# Altium PCB 3_inch_V1.PcbDoc (part 1 of 2)
Units mm, origin at the board's own origin, x right, y up, seen from the top; angles counter-clockwise.
Board outline 36.7 x 32 mm, 4 copper layers (Top Copper, Signal Layer 1, Signal Layer 2, Bottom Copper), stack 1.17 mm thick; 15 components, 44 nets, 117 pads, 124 vias.
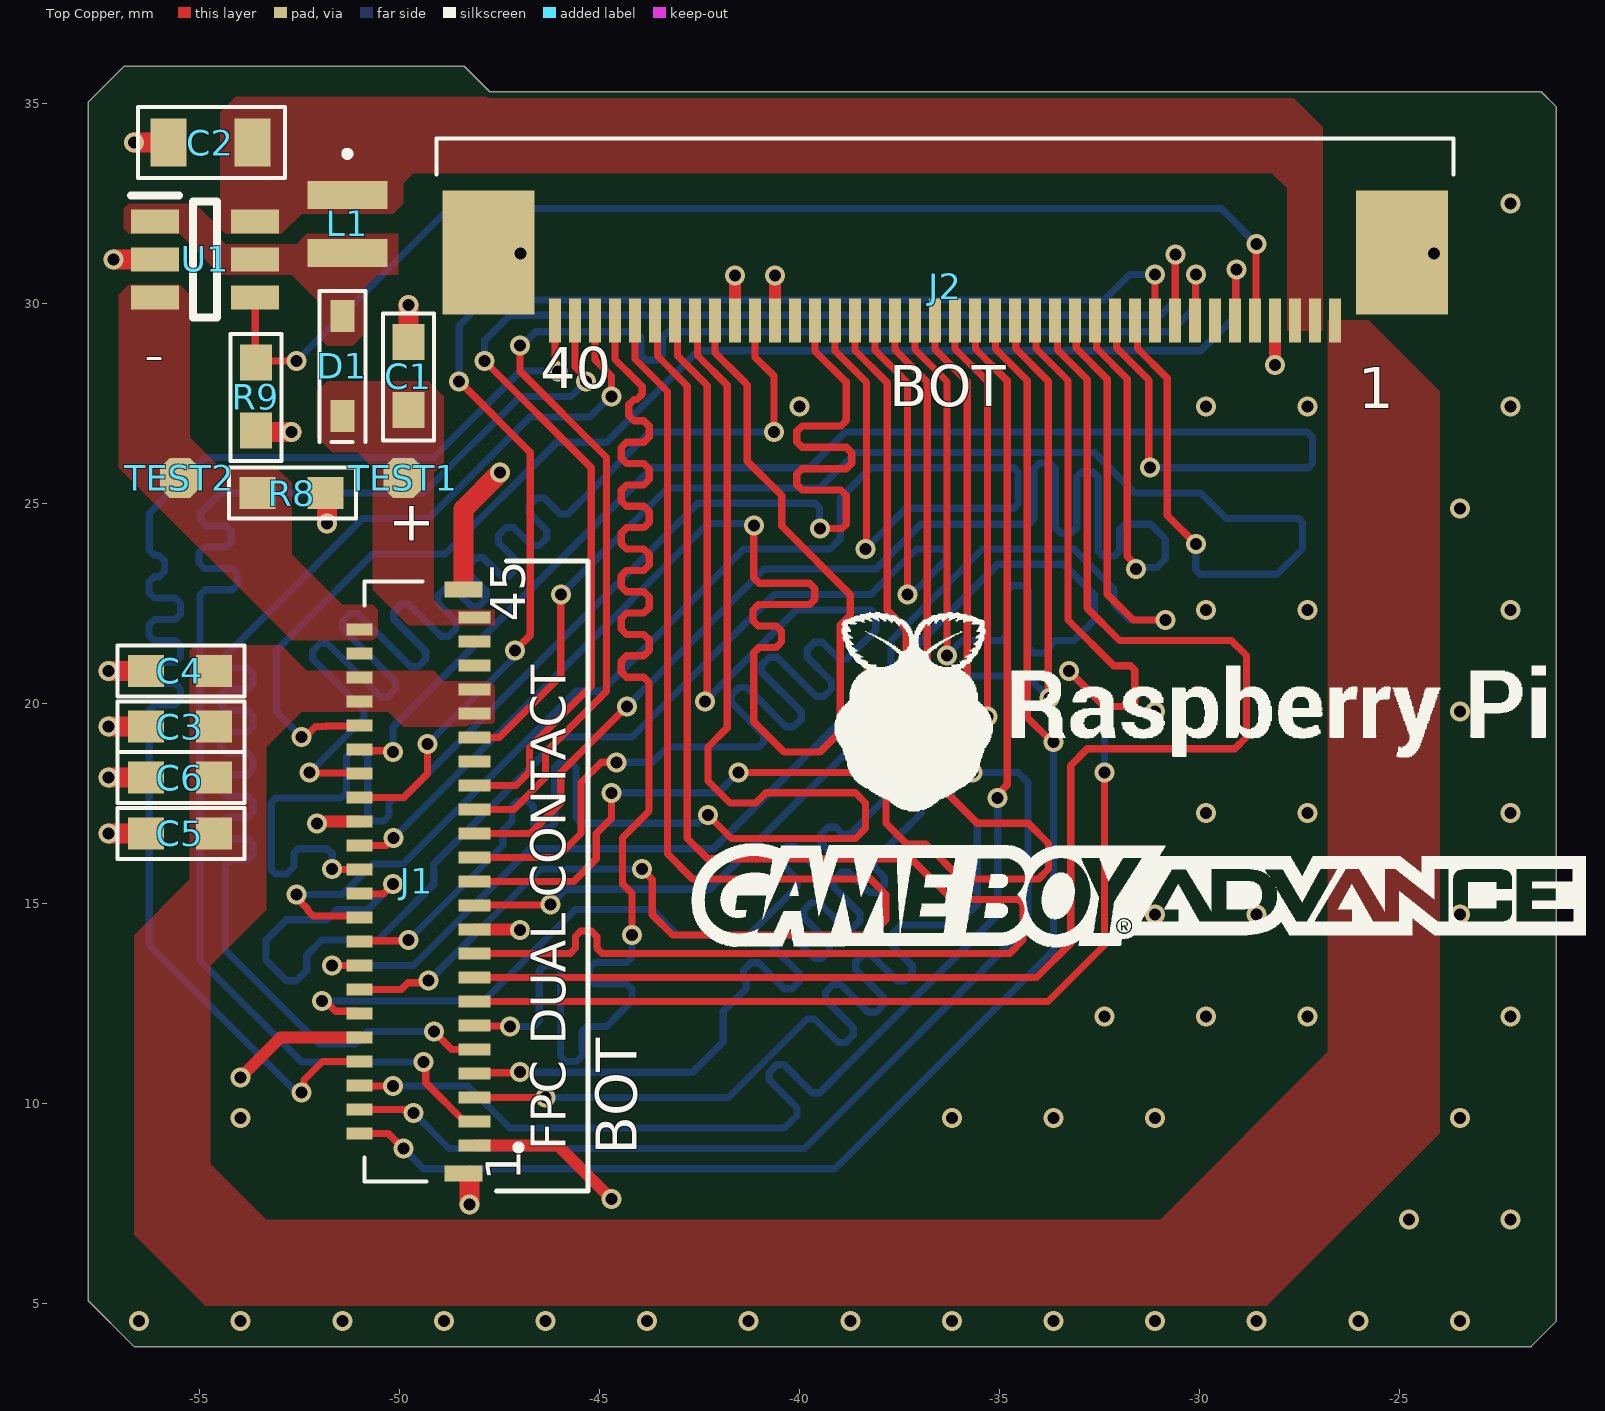
[diagram p0: Top Copper view]
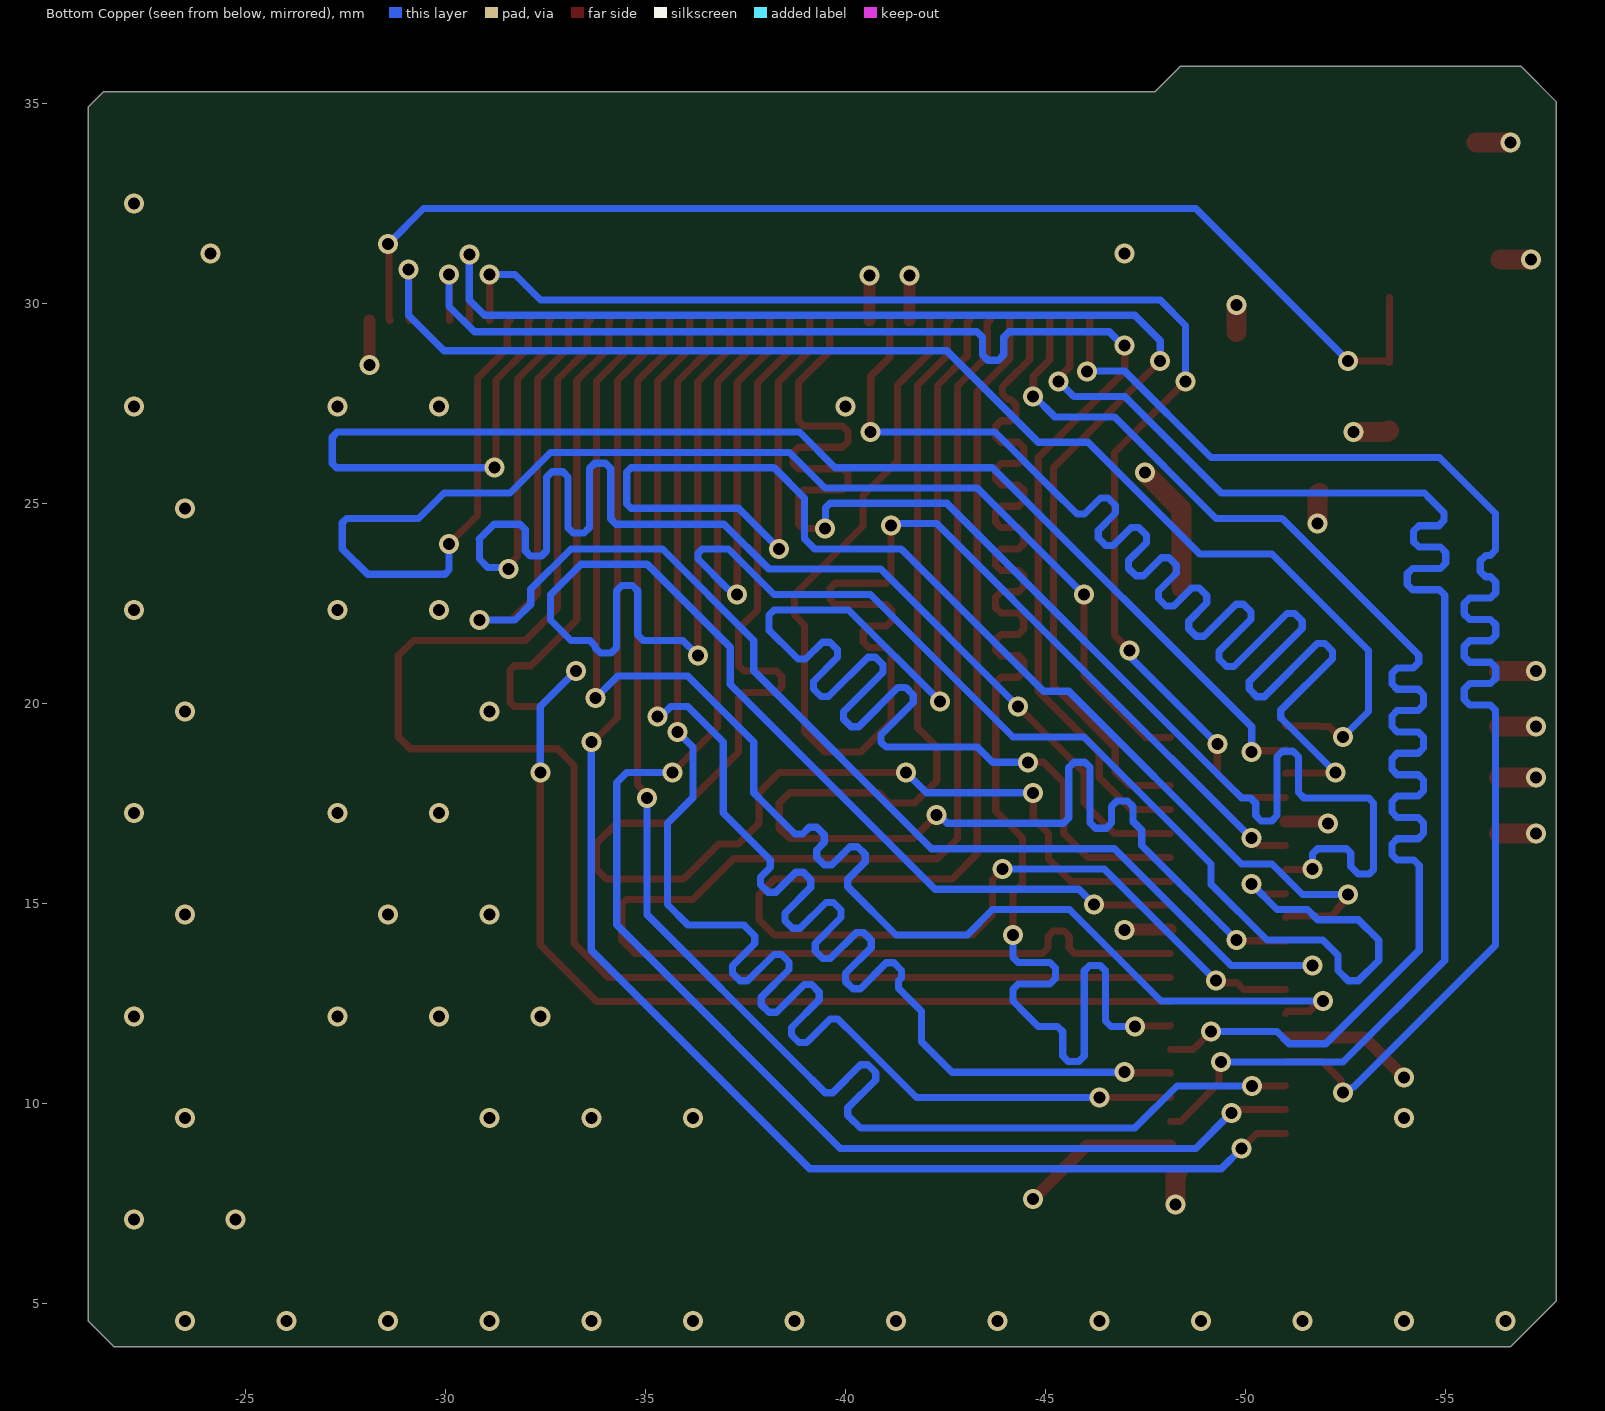
[diagram p1: Bottom Copper view, seen from below]
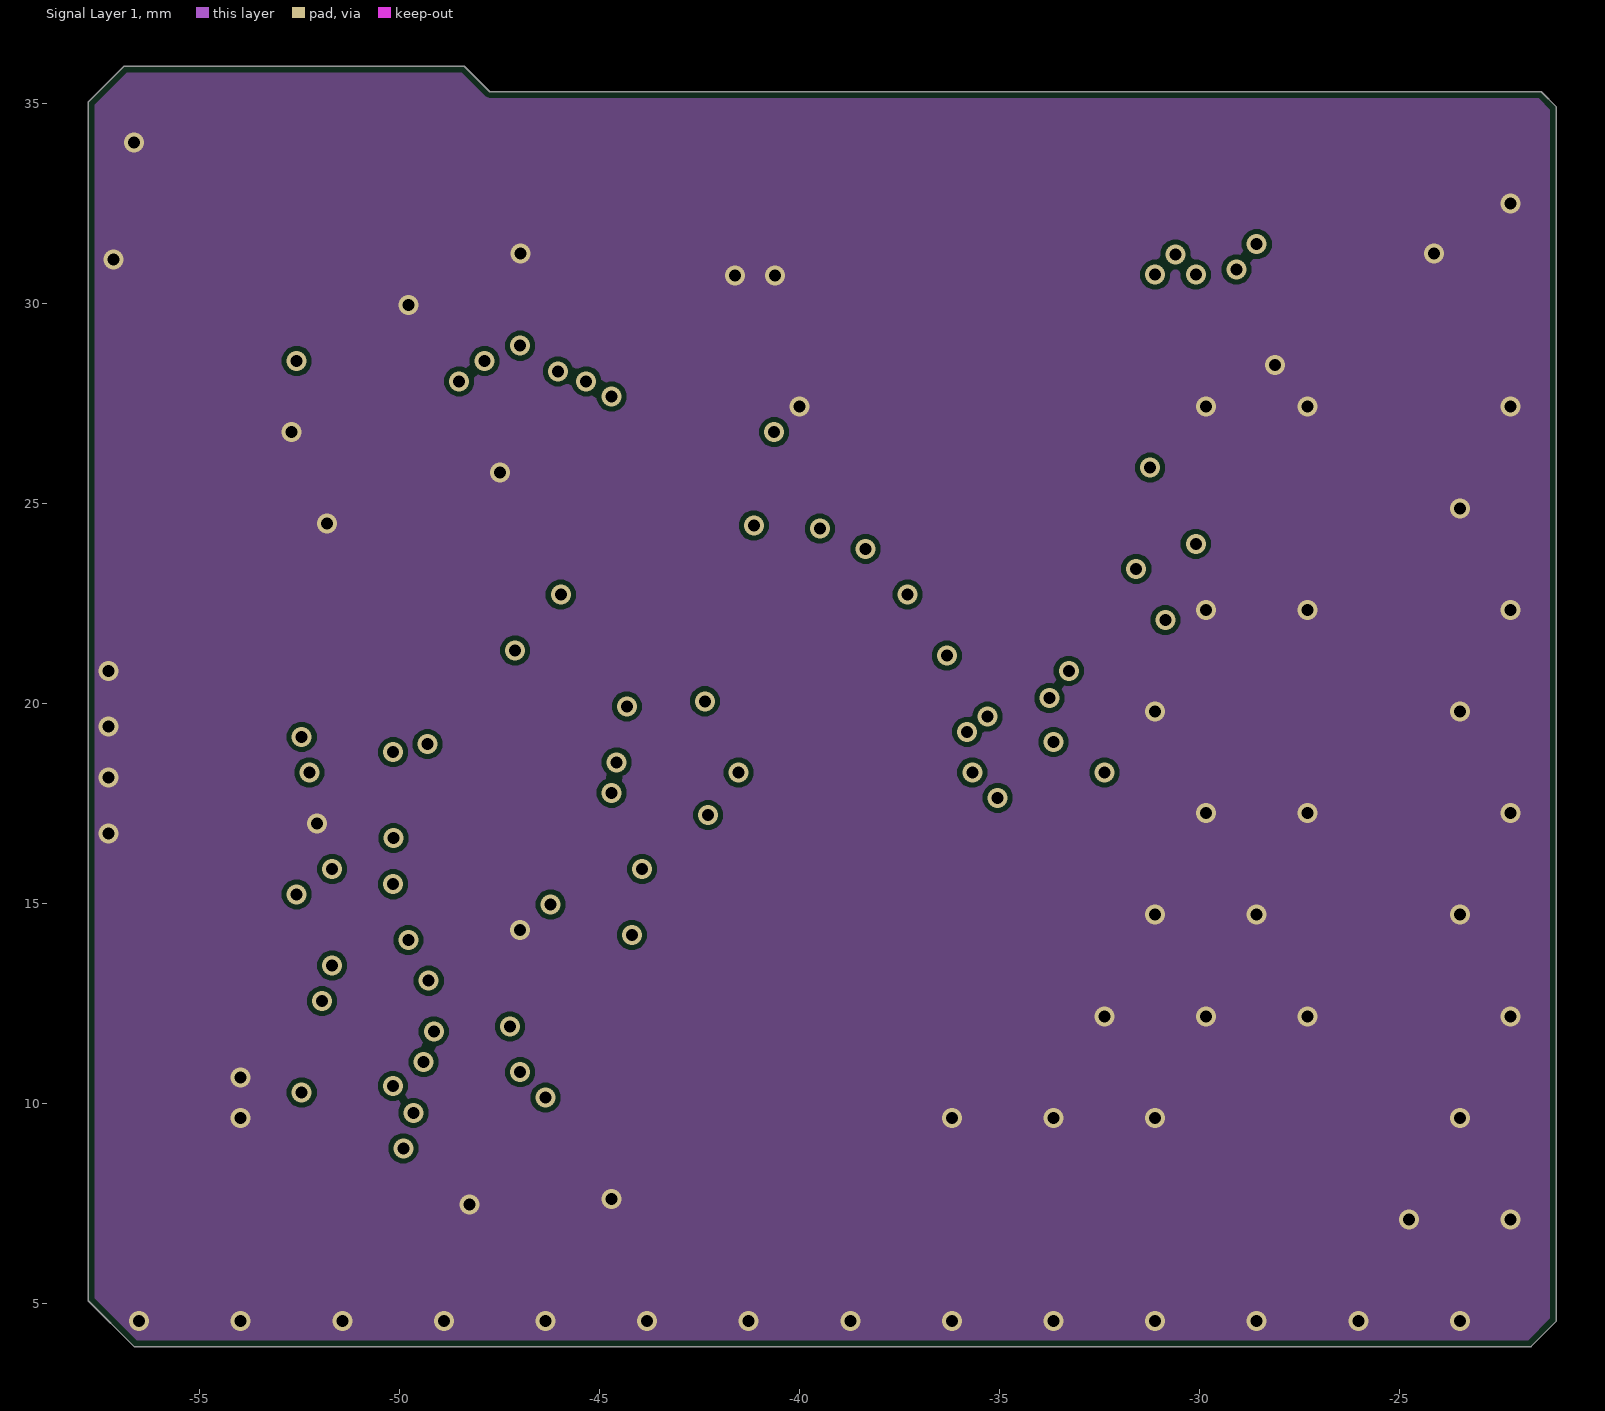
[diagram p2: Signal Layer 1]
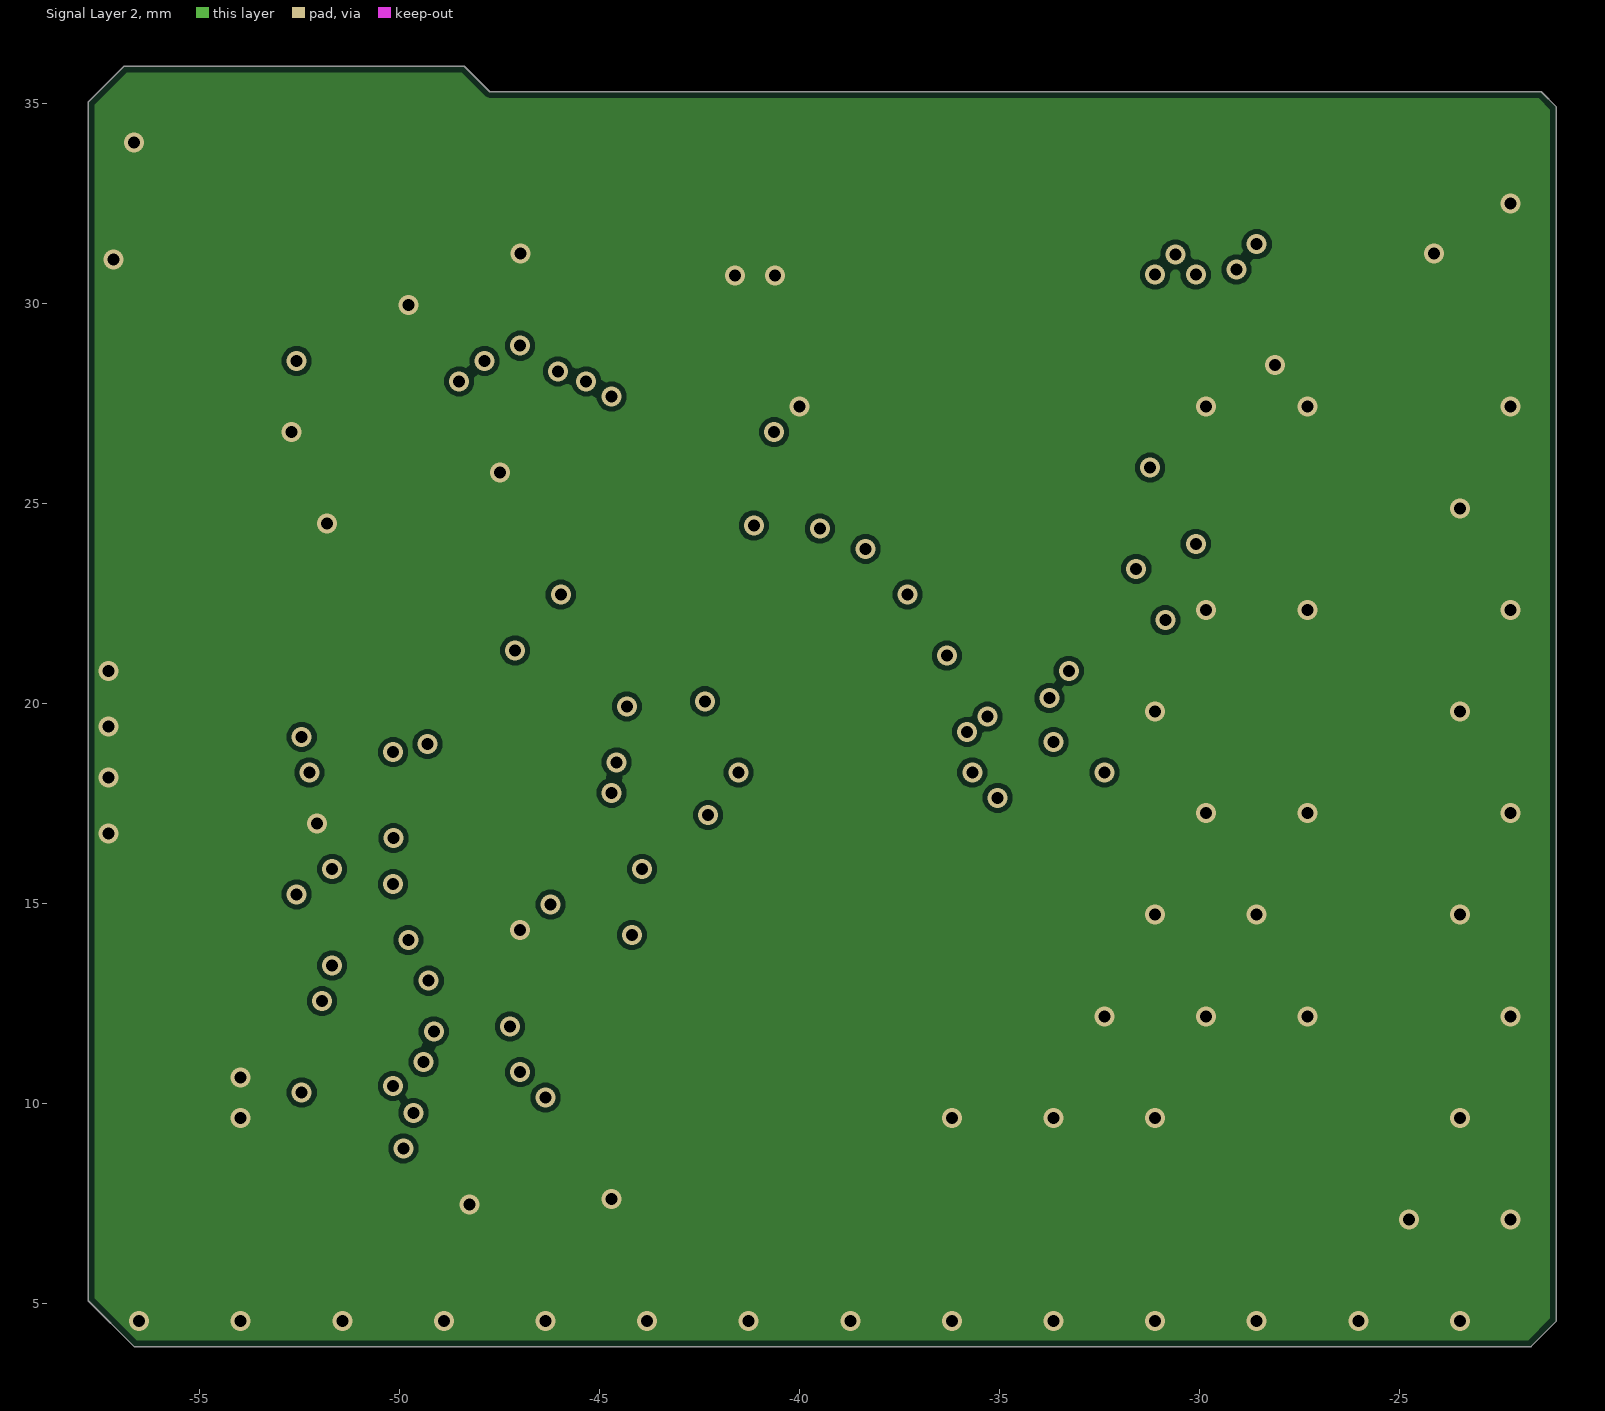
[diagram p3: Signal Layer 2]

## Layer stack, top to bottom
Top Mask: solder mask 0.015, Solder Resist, Dk 3.8
Top Copper: signal copper 0.035
Dielectric 1: prepreg 0.1, 2313, Dk 4.05
Signal Layer 1: signal copper 0.0175
Core: core 0.865, FR-4, Dk 4.5
Signal Layer 2: signal copper 0.0175
Dielectric 2: prepreg 0.1, 2313, Dk 4.05
Bottom Copper: signal copper 0.035
Bottom Mask: solder mask 0.015, Solder Resist, Dk 3.8

## Board outline
-57.785,5.08 -57.785,35.052 -56.896,35.941 -48.387,35.941 -47.752,35.306 -21.463,35.306 -21.082,34.925 -21.082,4.572 -21.717,3.937 -56.642,3.937

## Design rules (kind name [scope] priority, off if disabled: settings)
BoardOutlineClearance [All] p1: gap=0.15 ignorepadtopadclearanceinfootprint=FALSE except(0.4: Arc-SplitBarrior Arc-SplitContinuation Track-SplitBarrior Track-SplitContinuation SMDPad-SplitBarrior SMDPad-SplitContinuation THPad-SplitBarrior THPad-SplitContinuation Via-SplitBarrior Via-SplitContinuation Fill-SplitBarrior Fill-SplitContinuation Poly-SplitBarrior Poly-SplitContinuation Region-SplitBarrior Region-SplitContinuation Text-SplitBarrior Text-SplitContinuation)
Clearance USB [InAnyDifferentialPair] p1: gap=0.25 ignorepadtopadclearanceinfootprint=FALSE except(0.09: Arc-Arc Arc-Track Arc-SMDPad Arc-THPad Arc-Via Track-Track Track-SMDPad Track-THPad Track-Via SMDPad-SMDPad SMDPad-THPad SMDPad-Via THPad-THPad THPad-Via Via-Via; 0.127: Arc-Hole Track-Hole SMDPad-Hole THPad-Hole Via-Hole Fill-Hole Poly-Hole Region-Hole Text-Hole; 0.254: Arc-Text Track-Text SMDPad-Text THPad-Text Via-Text Fill-Text Poly-Text Region-Text Text-Text)
Clearance RGB24 [InNetClass('RGB24Bit')] p2: gap=0.09 ignorepadtopadclearanceinfootprint=FALSE except(0.12: SMDPad-Fill SMDPad-Poly SMDPad-Region THPad-Fill THPad-Poly THPad-Region Via-Fill Via-Poly Via-Region; 0.127: Arc-Hole Track-Hole SMDPad-Hole THPad-Hole Via-Hole Fill-Hole Poly-Hole Region-Hole Text-Hole; 0.25: Arc-Fill Arc-Poly Arc-Region Track-Fill Track-Poly Track-Region Fill-Fill Fill-Poly Fill-Region Poly-Poly Poly-Region Region-Region; 0.254: Arc-Text Track-Text SMDPad-Text THPad-Text Via-Text Fill-Text Poly-Text Region-Text Text-Text)
Clearance [All] p3: gap=0.12 ignorepadtopadclearanceinfootprint=FALSE except(0.09: Arc-Arc Arc-Track Arc-SMDPad Track-Track Track-SMDPad SMDPad-SMDPad; 0.127: Arc-Via Arc-Hole Track-Via Track-Hole SMDPad-Via SMDPad-Hole THPad-Via THPad-Hole Via-Via Via-Hole Fill-Hole Poly-Hole Region-Hole Text-Hole; 0.2: Arc-THPad Track-THPad SMDPad-THPad THPad-THPad; 0.254: Arc-Text Track-Text SMDPad-Text THPad-Text Via-Text Fill-Text Poly-Text Region-Text Text-Text)
ComponentClearance [All] p1: gap=0.127 collisioncheckmode=3 verticalgap=0.254 showdistances=FALSE
HoleSize [All] p1: absolutevalues=TRUE maxlimit=6.3 minlimit=0.3 maxpercent=80.000 minpercent=20.000
MinimumAnnularRing [All] p1: minimumring=0.076
MinimumSolderMaskSliver [All] p1: minsoldermaskwidth=0
PlaneClearance [All] p1: clearance=1
PlaneConnect [All] p1: planeconnectstyle=Direct reliefexpansion=0.508 reliefentries=4 reliefconductorwidth=0.254 reliefairgap=0.254
PolygonConnect PolygonConnect_1 [All] p1: connectstyle=Direct reliefconductorwidth=0.508 reliefentries=4 polygonreliefangle="45 Angle" airgapwidth=0.254
RoutingCorners [All] p1: cornerstyle=Round minsetback=2.54 maxsetback=2.54
RoutingVias [All] p1: holewidth=0.5 width=1 viastyle="Through Hole" minholewidth=0.2 minwidth=0.45 maxholewidth=1 maxwidth=2
SilkToSilkClearance [All] p1: silktosilkclearance=0.1
SilkToSolderMaskClearance [IsPad] p1: minsilkscreentomaskgap=0.1 clearancetoexposedcopper=TRUE
SolderMaskExpansion [All] p1: expansion=0.102 istentingtop=FALSE
UnRoutedNet [All] p1: checkbadconnections=TRUE
Width [All] p1: maxlimit=8 minlimit=0.18 preferedwidth=0.18
Width "Schematic Width Constraint" [InNetClass('RGB24Bit')] p2: maxlimit=0.254 minlimit=0.18 preferedwidth=0.18 toplayer_maxwidth=0.18 bottomlayer_maxwidth=0.18 minimp=50.000000 maximp=50.000000 favimp=50.000000
21 further rules are at their usual default settings.

## Classes and differential pairs
net class RGB24Bit: CS DB_0 DB_1 DB_2 DB_3 DB_4 DB_5 DB_6 DB_7 DCLK DE DG_0 DG_1 DG_2 DG_3 DG_4 DG_5 DG_6 DG_7 DR_0 DR_1 DR_2 DR_3 DR_4 DR_5 DR_6 DR_7 GPIO_2 GPIO_3

## Components (designator, comment, footprint, x,y, rotation, side; value= is the part's Value field where it differs from the comment)
C1 "1UF 25v X5R 0603" "C 0603/1608" -49.784,28.194 r90 top
C2 "10uF 16V X7R 0805" "C 0805/2012" -54.737,34.036 r0 top
C3 "1UF 25v X5R 0603" "C 0603/1608" -55.499,19.431 r180 top
C4 "1UF 25v X5R 0603" "C 0603/1608" -55.499,20.828 r180 top
C5 "1UF 25v X5R 0603" "C 0603/1608" -55.499,16.764 r180 top
C6 "1UF 25v X5R 0603" "C 0603/1608" -55.499,18.161 r180 top
D1 "40V 250mA SOD323" SOD-323 -51.435,28.448 r90 top
J1 "45P 0,3mm BOT" FH26W45S03SHW60 -49.458,15.564 r90 top
J2 "40P 0,5mm Bot" 417345920 -36.366,29.741 r180 top
L1 "6.8uH 0,.7A" NRH2410T6R8MN -51.308,32.004 r270 top
R8 "10R 0603 1%" "R 0603/1608" -52.705,25.273 r180 top
R9 "1M 1% 1/10W 0603" "R 0603/1608" -53.594,27.686 r90 top
TEST1 "TestPad" TestPad -49.911,25.654 r90 top
TEST2 "TestPad" TestPad -55.499,25.654 r90 top
U1 "Backlight Driver" SOT95P280X145-6N -54.864,31.115 r0 top

## Footprints (in the part's own frame and the unit in brackets; to place one, negate y for a bottom-side part, rotate by r counter-clockwise, add the part's x,y. Pads: shape width x height; smd on the part's side, far side on the other; paste and mask are expansions set on the pad)
417345920 [mm]
  rect 0.3x1.1 smd: 1(-9.75,0.15) 2(-9.25,0.15) 3(-8.75,0.15) 4(-8.25,0.15) 5(-7.75,0.15) 6(-7.25,0.15) 7(-6.75,0.15) 8(-6.25,0.15) 9(-5.75,0.15) 10(-5.25,0.15) 11(-4.75,0.15) 12(-4.25,0.15) 13(-3.75,0.15) 14(-3.25,0.15) 15(-2.75,0.15) 16(-2.25,0.15) 17(-1.75,0.15) 18(-1.25,0.15) 19(-0.75,0.15) 20(-0.25,0.15) 21(0.25,0.15) 22(0.75,0.15) 23(1.25,0.15) 24(1.75,0.15) 25(2.25,0.15) 26(2.75,0.15) 27(3.25,0.15) 28(3.75,0.15) 29(4.25,0.15) 30(4.75,0.15) 31(5.25,0.15) 32(5.75,0.15) 33(6.25,0.15) 34(6.75,0.15) 35(7.25,0.15) 36(7.75,0.15) 37(8.25,0.15) 38(8.75,0.15) 39(9.25,0.15) 40(9.75,0.15)
  rect 2.3x3.1 smd: SH(-11.42,-1.55) SH(11.42,-1.55)
  silkscreen extent -12.72,-4.4 12.72,-3.5, body extent -12.72,-4.62 12.72,0.49, height 2.05
"C 0603/1608" [mm]
  rect 0.9x0.8 smd: 1(-0.85,0) 2(0.85,0)
  silkscreen extent -1.61,-0.64 1.56,0.64, body extent -1.3,-0.4 1.3,0.4, height 0.64
"C 0805/2012" [mm]
  rect 0.9x1.2 smd: 1(-1.05,0) 2(1.05,0)
  silkscreen extent -1.81,-0.89 1.87,0.89, body extent -1.5,-0.6 1.5,0.6, height 0.64
FH26W45S03SHW60 [mm]
  rect 0.3x0.8 smd: 1(-6.6,-1.325) 3(-6,-1.325) 5(-5.4,-1.325) 7(-4.8,-1.325) 9(-4.2,-1.325) 11(-3.6,-1.325) 13(-3,-1.325) 15(-2.4,-1.325) 17(-1.8,-1.325) 19(-1.2,-1.325) 21(-0.6,-1.325) 23(0,-1.325) 25(0.6,-1.325) 27(1.2,-1.325) 29(1.8,-1.325) 31(2.4,-1.325) 33(3,-1.325) 35(3.6,-1.325) 37(4.2,-1.325) 39(4.8,-1.325) 41(5.4,-1.325) 43(6,-1.325) 45(6.6,-1.325)
  rect 0.3x0.65 smd: 2(-6.3,1.55) 4(-5.7,1.55) 6(-5.1,1.55) 8(-4.5,1.55) 10(-3.9,1.55) 12(-3.3,1.55) 14(-2.7,1.55) 16(-2.1,1.55) 18(-1.5,1.55) 20(-0.9,1.55) 22(-0.3,1.55) 24(0.3,1.55) 26(0.9,1.55) 28(1.5,1.55) 30(2.1,1.55) 32(2.7,1.55) 34(3.3,1.55) 36(3.9,1.55) 38(4.5,1.55) 40(5.1,1.55) 42(5.7,1.55) 44(6.3,1.55)
  rect 0.4x0.95 smd: 46(7.3,-1.05) 47(-7.3,-1.05)
  silkscreen extent -7.73,-4.17 8.01,1.43, body extent -7.49,-1.75 7.51,1.75, height 1
NRH2410T6R8MN [mm]
  rect 0.7x2 smd: 1(-0.725,0) 2(0.725,0)
  silkscreen extent -1.8,-0.05 -1.7,0.05, body extent -1.2,-1.2 1.2,1.2, height 1.1
"R 0603/1608" [mm]
  rect 0.9x0.8 smd: 1(-0.85,0) 2(0.85,0)
  silkscreen extent -1.61,-0.64 1.56,0.64, body extent -1.3,-0.4 1.3,0.4, height 0.64
SOD-323 [mm]
  rect 0.8x0.6 smd: 1(-1.25,0) 2(1.25,0)
  silkscreen extent -1.9,-0.58 1.88,0.58, body extent -1.23,-0.63 1.28,0.63, height 0.9
SOT95P280X145-6N [mm]
  rect 1.2x0.6 smd: 1(-1.25,0.95) 2(-1.25,0) 3(-1.25,-0.95) 4(1.25,-0.95) 5(1.25,0) 6(1.25,0.95)
  silkscreen extent -1.85,-1.45 0.3,1.6, body extent -1.4,-1.45 1.4,1.45, height 1.45
TestPad [mm]
  oct 1x1 smd paste-2: 1(0,0)

## Part data
C1 C3 C4 C5 C6: library part CC0603KRX5R8BB105, "CAP CER 1UF 25V X5R 0603", Capacitance=1uF, Case Code (Imperial)=0603, Case Code (Metric)=1608, Dielectric=X5R, Manufacturer=Yageo, Max Operating Temperature=85°C, Min Operating Temperature=-55°C, Package Quantity=1, Supplier Part Number 1=603-CC603KRX5R8BB105, Tolerance=10%, Voltage Rating=25V, Case/Package=0603, ComponentLink1Description=https://datasheet.ciiva.com/176/mlccorderingcode-176785.pdf?src-supplier=Digi-Key, ComponentLink1URL=https://datasheet.ciiva.com/176/mlccorderingcode-176785.pdf?src-supplier=Digi-Key, ComponentLink2Description=https://datasheet.ciiva.com/176/mlccorderingcode-176786.pdf?src-supplier=Digi-Key, ComponentLink2URL=https://datasheet.ciiva.com/176/mlccorderingcode-176786.pdf?src-supplier=Digi-Key, ComponentLink3Description=https://datasheet.ciiva.com/176/mlccorderingcode-176787.pdf?src-supplier=Digi-Key, ComponentLink3URL=https://datasheet.ciiva.com/176/mlccorderingcode-176787.pdf?src-supplier=Digi-Key, ComponentLink4Description=https://datasheet.ciiva.com/17436/upy-gphc-x5r-4v-to-50v-12-17436952.pdf?src-supplier=Avnet+Europe, ComponentLink4URL=https://datasheet.ciiva.com/17436/upy-gphc-x5r-4v-to-50v-12-17436952.pdf?src-supplier=Avnet+Europe, ComponentLink5Description=https://datasheet.ciiva.com/7978/1525783-7978171.pdf?src-supplier=Element14, ComponentLink5URL=https://datasheet.ciiva.com/7978/1525783-7978171.pdf?src-supplier=Element14, ComponentLink6Description=https://datasheet.ciiva.com/11586/upy-gphc-x5r-4v-to-50v-12-11586318.pdf?src-supplier=Avnet, ComponentLink6URL=https://datasheet.ciiva.com/11586/upy-gphc-x5r-4v-to-50v-12-11586318.pdf?src-supplier=Avnet, Depth=0.8mm, Halogen Free="Halogen Free", Height=0.8mm, Lead Free="Lead Free", Length=1.6mm, Manufacturer Part Number=CC0603KRX5R8BB105, Mount="Surface Mount", Number of Pins=2, Packaging="Tape and Reel", Pricing 1="1 = 0,10000, 10 = 0,04700, 50 = 0,04700, 100 = 0,01700, 1000 = 0,01600, 10000 = 0,00800 (USD)", Radiation Hardening=No, REACH SVHC="No SVHC", RoHS=Yes, Stock 1=9567246, Supplier 1=Mouser, Termination=SMD/SMT, Thickness=0.035inch, Voltage Rating (DC)=25V, Width=0.031inch
C2: library part CL21B106KOQNNNE, "CAP CER 10UF 16V X7R 0805", Manufacturer="Samsung Electro-Mechanics", Operating Temperature="-55°C ~ 125°C", Package / Case="0805 (2012 Metric)", Ratings=-, Supplier Part Number 1=1276-2872-1-ND, Temperature Coefficient=X7R, Tolerance=±10%, Voltage - Rated=16V, Applications="General Purpose", Category=Capacitors, ComponentLink1Description=http://www.samsungsem.com/kr/support/product-search/mlcc/CL21B106KOQNNNE.jsp, ComponentLink1URL=http://www.samsungsem.com/kr/support/product-search/mlcc/CL21B106KOQNNNE.jsp, Features=-, Height - Seated (Max)=-, Lead Spacing=-, Lead Style=-, Manufacturer Part Number=CL21B106KOQNNNE, Mounting Type="Surface Mount, MLCC", Notification="Current market demand for these product types have resulted in fluctuating and extending lead times. Lead times may differ.", Packaging="Cut Tape (CT)", Part Status=Active, Pricing 1="1=0.24, 10=0.163, 100=0.0923, 500=0.06514, 1000=0.057 (GBP)", RoHS="RoHS Compliant", Size / Dimension="0.079\" L x 0.049\" W (2.00mm x 1.25mm)", Stock 1=20000, Supplier 1=Digi-Key, Thickness (Max)="0.055\" (1.40mm)"
D1: library part NSR0240HT1G, "DIODE SCHOTTKY 40V 250MA SOD323", Average Rectified Current=250mA, Case/Package=SOD-323-2, Forward Voltage=710mV, Manufacturer="ON Semiconductor", Max Forward Surge Current (Ifsm)=1A, Max Operating Temperature=150°C, Max Repetitive Reverse Voltage (Vrrm)=40V, Max Reverse Leakage Current=10uA, Min Operating Temperature=-55°C, Package Quantity=1, Power Dissipation=270mW, Supplier Part Number 1=863-NSR0240HT1G, ComponentLink1Description=https://datasheet.ciiva.com/4714/nsr0240h-d-113658-4714368.pdf?src-supplier=Mouser, ComponentLink1URL=https://datasheet.ciiva.com/4714/nsr0240h-d-113658-4714368.pdf?src-supplier=Mouser, ComponentLink2Description=https://datasheet.ciiva.com/8293/nsr0240h-d-8293840.pdf?src-supplier=Avnet, ComponentLink2URL=https://datasheet.ciiva.com/8293/nsr0240h-d-8293840.pdf?src-supplier=Avnet, ComponentLink3Description=https://datasheet.ciiva.com/25949/nsr0240h-d-25949637.pdf?src-supplier=Avnet+Europe, ComponentLink3URL=https://datasheet.ciiva.com/25949/nsr0240h-d-25949637.pdf?src-supplier=Avnet+Europe, ComponentLink4Description=https://datasheet.ciiva.com/915/nsr0240h-d-915416.pdf?src-supplier=Digi-Key, ComponentLink4URL=https://datasheet.ciiva.com/915/nsr0240h-d-915416.pdf?src-supplier=Digi-Key, ComponentLink5Description=https://datasheet.ciiva.com/915/nsr0240h-d-915417.pdf?src-supplier=Digi-Key, ComponentLink5URL=https://datasheet.ciiva.com/915/nsr0240h-d-915417.pdf?src-supplier=Digi-Key, ComponentLink6Description=https://datasheet.ciiva.com/16396/nsr0240h-d-16396521.pdf?src-supplier=Future+Electronics, ComponentLink6URL=https://datasheet.ciiva.com/16396/nsr0240h-d-16396521.pdf?src-supplier=Future+Electronics, ComponentLink7Description=https://datasheet.ciiva.com/915/nsr0240h-d-915418.pdf?src-supplier=Digi-Key, ComponentLink7URL=https://datasheet.ciiva.com/915/nsr0240h-d-915418.pdf?src-supplier=Digi-Key, ComponentLink8Description=https://datasheet.ciiva.com/7963/nsr0240h-d-7963165.pdf?src-supplier=Element14, ComponentLink8URL=https://datasheet.ciiva.com/7963/nsr0240h-d-7963165.pdf?src-supplier=Element14, Contact Plating=Tin, Element Configuration=Single, Forward Current=250mA, Height=1mm, Lead Free="Lead Free", Length=1.8mm, Manufacturer Part Number=NSR0240HT1G, Max Reverse Voltage (DC)=40V, Max Surge Current=1A, Number of Pins=2, Packaging="Tape and Reel", Peak Non-Repetitive Surge Current=1A, Peak Reverse Current=10uA, Pricing 1="1 = 0,23000, 10 = 0,15400, 50 = 0,15400, 100 = 0,06500, 1000 = 0,04400, 10000 = 0,03000 (USD)", Radiation Hardening=No, REACH SVHC="No SVHC", Recovery Time=3ns, Reverse Recovery Time=3ns, RoHS=Yes, Stock 1=30582, Supplier 1=Mouser, Width=1.35mm
J1: library part FH26W-45S-0.3SHW(60), "FFC FPC Connectors Horizontal Mounting Angle Light Brown 0.3 mm - Pitch 45 Positions", Manufacturer=Hirose, Supplier Part Number 1=798-FH26W45S03SHW60, Category="FFC / FPC", ComponentLink1Description=http://www.farnell.com/datasheets/2691081.pdf?src-supplier=Farnell, ComponentLink1URL=http://www.farnell.com/datasheets/2691081.pdf?src-supplier=Farnell, ComponentLink2Description=https://www.hirose.com/product/document?clcode=CL0580-2401-1-60&amp;productname=FH26W-13S-0.3SHW(60)&amp;series=FH26&amp;documenttype=Catalog&amp;lang=en&amp;documentid=D49355_en&src-supplier=Digi-Key, ComponentLink2URL=https://www.hirose.com/product/document?clcode=CL0580-2401-1-60&amp;productname=FH26W-13S-0.3SHW(60)&amp;series=FH26&amp;documenttype=Catalog&amp;lang=en&amp;documentid=D49355_en&src-supplier=Digi-Key, ComponentLink3Description=https://www.hirose.com/product/en/download_file/key_name/FH26W-61S-0.3SHW%2860%29/category/Drawing%20(2D)/doc_file_id/43329/?file_category_id=6&item_id=05802418460&is_series=&src-supplier=Digi-Key, ComponentLink3URL=https://www.hirose.com/product/en/download_file/key_name/FH26W-61S-0.3SHW%2860%29/category/Drawing%20(2D)/doc_file_id/43329/?file_category_id=6&item_id=05802418460&is_series=&src-supplier=Digi-Key, ComponentLink4Description=https://www.hirose.com/product/en/download_file/key_name/FH26/category/Catalog/doc_file_id/49355/?file_category_id=4&item_id=298&is_series=1&src-supplier=Digi-Key, ComponentLink4URL=https://www.hirose.com/product/en/download_file/key_name/FH26/category/Catalog/doc_file_id/49355/?file_category_id=4&item_id=298&is_series=1&src-supplier=Digi-Key, Manufacturer Part Number=FH26W-45S-0.3SHW(60), Pricing 1="1=2,29000, 10=1,92000, 50=1,92000, 100=1,79000, 1000=1,28000, 10000=1,13000 (USD)", RoHS=Yes, Stock 1=44650, Supplier 1=Mouser
J2: library part 4-1734592-0, "CONN FPC BOTTOM 40POS 0.50MM R/A", Actuator Color=Beige, Contact Current Rating=500mA, Contact Resistance=35mR, Flammability Rating="UL94 V-0", Housing Color=Natural, Manufacturer="TE Connectivity", Max Operating Temperature=85°C, Max Voltage Rating (AC)=250V, Min Operating Temperature=-40°C, Package Quantity=2000, Supplier Part Number 1=571-4-1734592-0, Actuator Material=Thermoplastic, Category="FFC / FPC", ComponentLink1Description=https://datasheet.ciiva.com/16317/4-1734592-0-16317310.pdf?src-supplier=Future+Electronics, ComponentLink1URL=https://datasheet.ciiva.com/16317/4-1734592-0-16317310.pdf?src-supplier=Future+Electronics, ComponentLink2Description=https://datasheet.ciiva.com/10365/eng-ds-1-1773440-6-0506-10365927.pdf?src-supplier=Avnet, ComponentLink2URL=https://datasheet.ciiva.com/10365/eng-ds-1-1773440-6-0506-10365927.pdf?src-supplier=Avnet, ComponentLink3Description=https://datasheet.ciiva.com/46396/1795029-46396773.pdf?src-supplier=Element14, ComponentLink3URL=https://datasheet.ciiva.com/46396/1795029-46396773.pdf?src-supplier=Element14, ComponentLink4Description=https://datasheet.ciiva.com/1437/586796-1437950.pdf?src-supplier=Element14, ComponentLink4URL=https://datasheet.ciiva.com/1437/586796-1437950.pdf?src-supplier=Element14, ComponentLink5Description=https://datasheet.ciiva.com/669/eng-cd-1734592-c-c-1734592-669272.pdf?src-supplier=Digi-Key, ComponentLink5URL=https://datasheet.ciiva.com/669/eng-cd-1734592-c-c-1734592-669272.pdf?src-supplier=Digi-Key, ComponentLink6Description=https://datasheet.ciiva.com/669/eng-cd-1734592-c-c-1734592-669273.pdf?src-supplier=Digi-Key, ComponentLink6URL=https://datasheet.ciiva.com/669/eng-cd-1734592-c-c-1734592-669273.pdf?src-supplier=Digi-Key, ComponentLink7Description=https://datasheet.ciiva.com/669/eng-cd-1734592-c-c-1734592-669274.pdf?src-supplier=Digi-Key, ComponentLink7URL=https://datasheet.ciiva.com/669/eng-cd-1734592-c-c-1734592-669274.pdf?src-supplier=Digi-Key, Connector System=Flex-to-Board, Connector Type=Receptacle,Connector,Socket, Contact Location=Bottom, Contact Material=Bronze, Contact Plating=Gold, Current Rating=500mA, Depth=5.1mm, ELV=Compliant, Gender=Female, Height=2.05mm, Housing Material=Polymer, Lead Free="Lead Free", Length=25.43mm, Manufacturer Part Number=4-1734592-0, Mating Alignment="Yes (With)", Mount="Surface Mount", Number of Contacts=40, Number of Positions=40, Number of Rows=1, Orientation="Right Angle", Packaging="Tape and Reel", PCB Mount Alignment="No (Without)", PCB Mount Retention=With, PCB Mounting Orientation="Right Angle", Pitch=0.5mm, Plating Thickness=0.025um, Pricing 1="1=0,99000, 10=0,82200, 50=0,82200, 100=0,78800, 1000=0,75400, 10000=0,66800 (USD)", Radiation Hardening=No, Reach SVHC Compliant=Yes, RoHS=Yes, RoHS Compliant=Yes, Sealable="No (Without)", Series=-, Shielding=Unshielded, Shrouded="Yes (With)", Stock 1=14667, Supplier 1=Mouser, Termination=SMD/SMT, Voltage Rating=250V, Width=5.1mm, Wire/Cable Type="Flat Flex"
L1: library part NRH2410T6R8MN, "Inductor Power Shielded Wirewound 6.8uH 20% 100KHz Ferrite 0.57A 0.492Ohm DCR T/R", Case/Package=Nonstandard, Current Rating=570mA, DC Resistance (DCR)=492mR, Inductance=6.8uH, Inductance Tolerance=20%, Manufacturer="Taiyo Yuden", Max DC Current=750mA, Max Operating Temperature=120°C, Min Operating Temperature=-25°C, Package Quantity=2500, Resistor Type=Wirewound, Self Resonant Frequency=43MHz, Supplier Part Number 1=963-NRH2410T6R8MN, Test Frequency=100kHz, Category="Fixed Inductors", ComponentLink1Description=https://datasheet.ciiva.com/1043/nrh2410t6r8mn-ss-1043809.pdf?src-supplier=Digi-Key, ComponentLink1URL=https://datasheet.ciiva.com/1043/nrh2410t6r8mn-ss-1043809.pdf?src-supplier=Digi-Key, ComponentLink2Description=https://datasheet.ciiva.com/8502/nrh2410t6r8mn-ss-8502817.pdf?src-supplier=Avnet, ComponentLink2URL=https://datasheet.ciiva.com/8502/nrh2410t6r8mn-ss-8502817.pdf?src-supplier=Avnet, ComponentLink3Description=https://datasheet.ciiva.com/25606/0900766b810b3cd2-25606903.pdf?src-supplier=RSComponents, ComponentLink3URL=https://datasheet.ciiva.com/25606/0900766b810b3cd2-25606903.pdf?src-supplier=RSComponents, Core Material=Ferrite, Depth=2.5mm, Halogen Free="Halogen Free", Height=1mm, Height - Seated (Max)=0.039inch, Lead Pitch=1.45mm, Length=2.4mm, Manufacturer Part Number=NRH2410T6R8MN, Mount="Surface Mount", Number of Pins=2, Packaging="Tape and Reel", Pricing 1="1=0,23000, 10=0,15400, 50=0,15400, 100=0,12400, 1000=0,09100, 10000=0,06800 (USD)", Radiation Hardening=No, REACH SVHC="No SVHC", RoHS=Yes, RoHS Compliant=Yes, Saturation Current=750mA, Series=NRH, Shielding=Shielded, Stock 1=34335, Supplier 1=Mouser, Termination=SMD/SMT, Tolerance=20%, Width=0.094inch
R8: library part RT0603FRE0710RL, "High Precision-High Stability Chip Resistor Thin Film 0603 10Ohm 1% Paper T/R", Case Code (Imperial)=0603, Case Code (Metric)=1608, Manufacturer=Yageo, Max Operating Temperature=125°C, Max Power Dissipation=100mW, Min Operating Temperature=-55°C, Package Quantity=5000, Resistance=10R, Resistance Tolerance=1%, Resistor Type="Thin Film", Supplier Part Number 1=603-RT0603FRE0710RL, Temperature Coefficient=50ppm/°C, Voltage Rating=75V, Case/Package=0603, Category="Chip SMD Resistors", ComponentLink1Description=https://datasheet.ciiva.com/12834/pyu-rt-1-to-0-05-rohs-l-4-12834894.pdf?src-supplier=Mouser, ComponentLink1URL=https://datasheet.ciiva.com/12834/pyu-rt-1-to-0-05-rohs-l-4-12834894.pdf?src-supplier=Mouser, ComponentLink2Description=https://datasheet.ciiva.com/2559/pyu-rt-1-to-0-05-rohs-l-5-2559486.pdf?src-supplier=Digi-Key, ComponentLink2URL=https://datasheet.ciiva.com/2559/pyu-rt-1-to-0-05-rohs-l-5-2559486.pdf?src-supplier=Digi-Key, Construction=Rectangular, Contact Plating=Tin,Lead, Depth=0.8mm, Features="Moisture Resistant", Height=0.022inch, Lead Free="Lead Free", Length=1.6mm, Manufacturer Part Number=RT0603FRE0710RL, Military Standard=Not, Number of Pins=2, Number of Terminations=2, Packaging="Tape and Reel", Power Rating=100mW, Pricing 1="1=0,10000, 10=0,06200, 50=0,06200, 100=0,02500, 1000=0,01200, 10000=0,00800 (USD)", REACH SVHC=Unknown, RoHS=Yes, RoHS Compliant=Yes, Series=RT, Stock 1=38412, Supplier 1=Mouser, Termination=SMD/SMT, Tolerance=1%, Voltage Rating (DC)=75V, Width=0.031inch
R9: library part RC0603FR-071ML, "RES SMD 1M OHM 1% 1/10W 0603", Case Code (Imperial)=0603, Case Code (Metric)=1608, Manufacturer 1=Yageo, Max Operating Temperature=155°C, Min Operating Temperature=-55°C, Package Quantity=5000, Power Rating=100mW, Resistance=1MR, Supplier Part Number 1=311-1.00MHRDKR-ND, Temperature Coefficient=100ppm/°C, Tolerance=1%, Voltage Rating=50V, Case/Package=0603, ComponentLink1Description=https://datasheet.ciiva.com/11819/0900766b80f96399-11819295.pdf?src-supplier=RSComponents, ComponentLink1URL=https://datasheet.ciiva.com/11819/0900766b80f96399-11819295.pdf?src-supplier=RSComponents, ComponentLink2Description=https://datasheet.ciiva.com/7983/443971-7983614.pdf?src-supplier=Element14, ComponentLink2URL=https://datasheet.ciiva.com/7983/443971-7983614.pdf?src-supplier=Element14, ComponentLink3Description=https://datasheet.ciiva.com/12555/rc0603-272842-12555388.pdf?src-supplier=Mouser, ComponentLink3URL=https://datasheet.ciiva.com/12555/rc0603-272842-12555388.pdf?src-supplier=Mouser, Composition="Thick Film", Depth=0.8mm, Height=0.45mm, Lead Free="Lead Free", Length=1.6mm, Manufacturer Part Number 1=RC0603FR-071ML, Military Standard=Not, Number of Pins=2, Packaging="Tape and Reel", Pricing 1="1=0,10000, 10=0,02400, 100=0,00970, 1000=0,00437, 2500=0,00379 (USD)", REACH SVHC="No SVHC", RoHS=Yes, Stock 1=9751331, Supplier 1=Digi-Key, Termination=SMD/SMT, Voltage Rating (DC)=50V, Width=0.8mm
TEST1 TEST2: library part PP_SMT_ROUND_2MM, "Probe Pad, SMT, ROUND, 2.0MM"
U1: library part AP3032KTR-G1, "AP3032 Series 9 V 1.3 MHz Surface Mount White LED Step-Up Converter - SOT-23-6", Case/Package=SOT-23-6, Frequency=1MHz, Manufacturer=Diodes, Max Input Voltage=9V, Max Operating Temperature=85°C, Max Output Voltage=38V, Min Input Voltage=2.7V, Min Operating Temperature=-40°C, Output Current per Channel=1.4A, Package Quantity=3000, Supplier Part Number 1=621-AP3032KTR-G1, Switching Frequency=750kHz, Category="LED Drivers", ComponentLink1Description=https://datasheet.ciiva.com/29602/ap3032-29602682.pdf?src-supplier=Digi-Key, ComponentLink1URL=https://datasheet.ciiva.com/29602/ap3032-29602682.pdf?src-supplier=Digi-Key, ComponentLink2Description=https://datasheet.ciiva.com/29603/ap3032-29603101.pdf?src-supplier=Digi-Key, ComponentLink2URL=https://datasheet.ciiva.com/29603/ap3032-29603101.pdf?src-supplier=Digi-Key, ComponentLink3Description=https://datasheet.ciiva.com/29603/ap3032-29603100.pdf?src-supplier=Digi-Key, ComponentLink3URL=https://datasheet.ciiva.com/29603/ap3032-29603100.pdf?src-supplier=Digi-Key, Dimming=PWM, Lead Free="Lead Free", Manufacturer Part Number=AP3032KTR-G1, Max Supply Voltage=9V, Mount="Surface Mount", Number of Channels=1, Number of Outputs=1, Number of Pins=6, Packaging="Tape and Reel", Pricing 1="1=0,41000, 10=0,33600, 50=0,33600, 100=0,20700, 500=0,17200, 1000=0,12900, 3000=0,11700, 9000=0,10300, 10000=0,10300, 24000=0,09700 (USD)", RoHS=Yes, RoHS Compliant=Yes, Stock 1=35875, Supplier 1=Mouser, Topology=Boost, Weight=0.000529oz

## Via types
v1: diameter 0.5/0.5/0.5/0.5 (per signal layer), hole 0.3, Top Copper to Bottom Copper, tented both sides, 124 vias

## Nets (pads, with @x,y where several pads share a name; then routed paths per layer and width w, separated by ;. In a path a pad name is that pad's centre, name@x,y a point inside that pad or via, vN(x,y) a via of type N, cw(c..) or ccw(c..) an arc to the next point about the centre after c; other vN are vias at no path point)
3V3_SYS: C3.1 C4.1 C5.1 C6.1 J1.37 J1.38 J1.39 J1.40 J2.1
CLK_SPI: J1.31 J2.9 | length 34.5
  Top Copper w0.18: J1.31 -47.095,17.964 -46.754,18.306 -46.754,18.905 -45.212,20.447 -45.212,25.908 v1(-47.879,28.575) ; J2.9 -30.612,29.595 -30.612,31.237 v1(-30.607,31.242)
  Bottom Copper w0.18: v1(-47.879,28.575) -47.879,29.083 -47.244,29.718 -30.988,29.718 -30.607,30.099 v1(-30.607,31.242)
CS: J1.30 J2.10 | length 34
  Top Copper w0.18: J1.30 -49.9,17.664 -49.306,18.258 v1(-49.306,18.997) ; v1(-48.514,28.067) -46.736,26.289 -46.736,21.717 v1(-47.117,21.336) ; J2.10 v1@-31.116,30.733
  Bottom Copper w0.18: v1(-49.306,18.997) -47.117,21.186 v1(-47.117,21.336) ; v1(-48.514,28.067) -48.514,29.464 -47.879,30.099 -32.385,30.099 -31.75,30.734 v1(-31.115,30.734)
CTRL_WLED: J2.5 R9.2 U1.4 | length 30.5
  Top Copper w0.18: U1.4 -53.614,28.556 R9.2 -53.555,28.575 v1(-52.578,28.575) ; J2.5 -28.596,29.612 -28.596,31.475 v1(-28.575,31.496)
  Bottom Copper w0.18: v1(-52.578,28.575) -48.768,32.385 -29.464,32.385 v1(-28.575,31.496)
DB_0: J1.27 J2.13 | length 36
  Top Copper w0.18: J1.27 -46.736,16.764 -45.974,17.526 -45.974,18.288 v1(-44.323,19.939) ; J2.13 -32.584,29.559 -32.584,28.901 -31.81,28.127 -31.81,23.687 -31.588,23.465 v1(-31.588,23.378)
  Bottom Copper w0.18: v1(-44.323,19.939) -40.884,23.378 -38.09,23.378 -36.973,24.495 -35.433,24.495 -34.275,24.495 -34.141,24.629 -34.141,25.886 -34.008,26.019 -33.741,26.019 -33.607,25.886 -33.607,24.406 -33.474,24.273 -33.207,24.273 -33.073,24.406 -33.073,25.674 -32.94,25.808 -32.673,25.808 -32.539,25.674 -32.539,23.829 -32.406,23.696 -32.139,23.696 -32.005,23.829 -32.005,24.362 -31.872,24.495 -31.742,24.495 -31.226,24.495 -30.853,24.122 -30.861,24.114 -30.861,23.622 -31.068,23.415 -31.551,23.415 v1(-31.588,23.378)
DB_1: J1.26 J2.32 | length 36.5
  Top Copper w0.18: J1.26 -50.338,16.464 v1(-50.156,16.647) ; J2.32 -42.116,28.783 -41.402,28.069 -41.402,28.067 -41.31,27.975 -41.31,26.07 -40.45,25.21 -40.45,24.448 -38.735,22.733 -38.735,22.225 -38.989,21.971 -38.989,19.304 -39.497,18.796 -40.386,18.796 -41.148,19.558 -41.148,20.447 -41.148,21.282 -41.015,21.415 -40.589,21.415 -40.455,21.549 -40.455,21.816 -40.589,21.949 -41.038,21.949 -41.172,22.083 -41.172,22.35 -41.038,22.483 -39.757,22.483 -39.624,22.617 -39.624,22.884 -39.757,23.017 -41.015,23.017 -41.148,23.151 -41.148,23.241 v1(-41.148,24.462)
  Bottom Copper w0.18: v1(-50.156,16.647) -46.101,20.701 -42.291,24.511 -41.197,24.511 v1(-41.148,24.462)
DB_2: J1.25 J2.34 | length 36.1
  Top Copper w0.18: J1.25 -46.066,16.164 -45.466,16.764 -45.466,18.034 -44.958,18.542 v1(-44.577,18.542) ; J2.34 -43.056,29.531 -43.056,28.705 -42.31,27.959 -42.31,20.129 v1(-42.371,20.068)
  Bottom Copper w0.18: v1(-44.577,18.542) -43.688,18.542 -43.307,18.923 -41.021,18.923 -40.963,18.981 -40.899,19.045 -40.899,19.234 -41.703,20.038 -41.703,20.227 -41.514,20.415 -41.326,20.415 -40.342,19.432 -40.153,19.432 -39.964,19.62 -39.964,19.809 -40.948,20.793 -40.948,20.982 -40.759,21.171 -40.57,21.171 -39.587,20.187 -39.398,20.187 -39.209,20.376 -39.209,20.564 -39.811,21.167 -39.811,21.356 -39.623,21.544 -39.434,21.544 -39.011,21.122 -38.822,21.122 -38.735,21.209 -38.1,21.844 -38.1,22.225 -38.227,22.352 -40.087,22.352 v1(-42.371,20.068)
DB_3: J1.24 J2.27 | length 35.9
  Top Copper w0.18: v1(-51.689,15.875) -51.678,15.864 J1.24 ; J2.27 -39.616,28.821 -38.849,28.054 -38.836,28.054 -38.836,27.819 -38.836,27.083 -38.97,26.95 -39.939,26.95 -40.072,26.816 -40.072,26.549 -39.939,26.416 -38.836,26.416 -38.702,26.283 -38.702,26.016 -38.836,25.882 -39.939,25.882 -40.072,25.749 -40.072,25.482 -39.939,25.348 -38.97,25.348 -38.836,25.215 -38.836,25.124 -38.836,24.489 -38.941,24.384 v1(-39.497,24.384)
  Bottom Copper w0.18: v1(-51.689,15.875) -51.689,16.256 -51.816,16.383 -52.536,16.383 -52.641,16.278 -52.641,15.939 -52.832,15.748 -53.108,15.748 -53.213,15.853 -53.213,17.526 -53.086,17.653 -51.558,17.653 -51.467,17.653 -51.334,17.786 -51.334,18.685 -51.2,18.818 -50.933,18.818 -50.8,18.685 -50.8,17.21 -50.667,17.077 -50.4,17.077 -50.266,17.21 -50.266,17.52 -50.133,17.653 -49.911,17.653 -49.526,18.038 -42.545,25.019 -39.624,25.019 -39.509,24.904 -39.509,24.396 v1(-39.497,24.384)
DB_4: J1.23 J2.25 | length 36.2
  Top Copper w0.18: J1.23 -45.65,15.564 -45.085,16.129 -45.085,16.764 -44.704,17.145 v1(-44.704,17.78) ; v1(-41.529,18.288) -38.354,18.288 -37.846,17.78 -37.846,17.018 -37.327,16.499 -36.841,16.499 -35.963,15.621 -34.036,15.621 -33.782,15.875 -33.782,16.51 -34.29,17.018 -35.56,17.018 -37.338,18.796 -37.338,20.066 -37.338,20.156 -37.471,20.29 -38.286,20.29 -38.42,20.423 -38.42,20.69 -38.286,20.824 -37.471,20.824 -37.338,20.957 -37.338,21.463 -37.338,21.88 -37.81,22.352 -37.81,28.031 -38.616,28.837 J2.25
  Bottom Copper w0.18: v1(-44.704,17.78) -42.037,17.78 v1(-41.529,18.288)
DB_5: J1.22 J2.24 | length 36.2
  Top Copper w0.18: J1.22 -50.996,15.252 -50.418,15.252 -50.176,15.494 v1(-50.165,15.494) ; J2.24 -38.116,28.845 -37.307,28.036 -37.307,22.74 v1(-37.304,22.737)
  Bottom Copper w0.18: v1(-50.165,15.494) -50.8,14.859 -51.562,14.859 -51.816,14.605 -52.832,14.605 -53.34,14.097 -53.34,13.589 -52.832,13.081 -52.578,13.081 -52.324,13.335 -52.324,13.716 -51.943,14.097 -50.546,14.097 -49.149,15.494 -49.149,16.002 -45.974,19.177 -44.196,19.177 -40.636,22.737 -38.223,22.737 -37.084,23.876 -36.428,23.876 -36.323,23.771 -36.323,23.621 -37.068,22.876 -37.078,22.876 -37.217,22.737 v1(-37.304,22.737)
DB_6: J1.21 J2.22 | length 36.2
  Top Copper w0.18: J1.21 -48.122,14.975 -46.239,14.975 v1(-46.228,14.986) ; J2.22 -37.116,28.861 -36.316,28.061 -36.316,21.215 v1(-36.322,21.209)
  Bottom Copper w0.18: v1(-46.228,14.986) -45.847,15.367 -42.251,15.367 -37.127,20.49 -37.127,21.42 -35.052,23.495 -33.401,23.495 -32.639,22.733 -32.639,22.098 -33.147,21.59 -33.528,21.59 -33.618,21.59 -33.752,21.457 -33.752,21.409 -33.885,21.275 -34.152,21.275 -34.286,21.409 -34.286,22.828 -34.419,22.962 -34.686,22.962 -34.82,22.828 -34.82,21.723 -34.953,21.59 -35.314,21.59 -35.941,21.59 v1(-36.322,21.209)
DB_7: J1.20 J2.26 | length 36.1
  Top Copper w0.18: v1(-52.578,15.24) -52.578,15.153 -52.29,14.866 -52.29,14.825 -52.163,14.698 -51.042,14.698 J1.20 ; J2.26 -39.116,28.829 -38.332,28.045 -38.332,23.898 v1(-38.354,23.876)
  Bottom Copper w0.18: v1(-52.578,15.24) -51.435,15.24 -50.673,16.002 -49.911,16.002 -45.593,20.32 -44.958,20.32 -41.402,23.876 -39.243,23.876 -38.989,24.13 -38.989,25.146 -38.227,25.908 -34.649,25.908 -34.544,25.803 -34.544,24.997 -34.649,24.892 -37.338,24.892 v1(-38.354,23.876)
DCLK: J1.32 J2.30 | length 35.7
  Top Copper w0.18: v1(-52.259,18.288) -52.247,18.276 -51.02,18.276 J1.32 ; J2.30 -41.116,28.67 -40.64,28.194 v1(-40.64,26.797)
  Bottom Copper w0.18: v1(-52.259,18.288) -50.958,19.589 -50.894,19.653 -50.894,19.841 -52.184,21.131 -52.184,21.32 -51.995,21.509 -51.807,21.509 -50.481,20.183 -50.292,20.183 -50.103,20.372 -50.103,20.561 -51.429,21.886 -51.429,22.075 -51.24,22.264 -51.051,22.264 -49.726,20.938 -49.537,20.938 -49.348,21.127 -49.348,21.316 -50.15,22.118 -50.15,22.307 -49.961,22.496 -49.773,22.496 -48.97,21.693 -48.782,21.693 -48.593,21.882 -48.593,22.071 -49.044,22.522 -49.044,22.711 -48.855,22.899 -48.666,22.899 -48.215,22.449 -48.026,22.449 -47.838,22.637 -47.838,22.826 -48.288,23.277 -48.288,23.466 -48.1,23.655 -47.911,23.655 -47.46,23.204 -47.271,23.204 -47.082,23.393 -47.082,23.581 -47.533,24.032 -47.533,24.221 -47.344,24.41 -47.156,24.41 -46.705,23.959 -46.516,23.959 -46.327,24.148 -46.327,24.337 -46.764,24.773 -46.764,24.962 -46.575,25.151 -46.386,25.151 -45.986,24.75 -45.797,24.75 -45.145,25.402 -43.75,26.797 v1(-40.64,26.797)
DE: J2.28
DG_0: J1.18 J2.33 | length 35.4
  Top Copper w0.18: J1.18 -50.992,14.081 -49.8,14.081 v1(-49.784,14.097) ; J2.33 -42.556,29.531 -42.556,28.713 -41.81,27.967 -41.81,19.404 -42.291,18.923 -42.291,18.073 -41.744,17.526 -41.099,17.526 -40.845,17.78 -38.608,17.78 -38.354,17.526 -38.354,16.891 -38.608,16.637 -41.705,16.637 v1(-42.291,17.223)
  Bottom Copper w0.18: v1(-49.784,14.097) -47.419,16.462 -47.419,16.843 -47.195,17.067 -47.195,17.441 -47.061,17.574 -46.794,17.574 -46.661,17.441 -46.661,17.028 -46.527,16.894 -46.26,16.894 -46.127,17.028 -46.127,18.41 -45.993,18.544 -45.726,18.544 -45.593,18.41 -45.593,17.151 -45.46,17.018 -45.006,17.018 -42.556,17.018 -42.351,17.223 v1(-42.291,17.223)
DG_1: J1.17 J2.35 | length 37.9
  Top Copper w0.18: J1.17 -45.83,13.764 -45.74,13.764 -45.606,13.898 -45.606,14.188 -45.473,14.322 -45.206,14.322 -45.072,14.188 -45.072,13.898 -44.939,13.764 -44.827,13.764 -34.75,13.764 -34.417,14.097 -34.417,15.008 -34.522,15.113 -36.195,15.113 -37.211,16.129 -42.302,16.129 -42.81,16.637 -42.81,27.951 -43.556,28.697 -43.556,29.531 J2.35
DG_2: J1.16 J2.14 | length 36.1
  Top Copper w0.18: v1(-51.689,13.462) v1(-51.689,13.462) -51.009,13.463 J1.16 ; J2.14 -33.088,29.563 -33.088,28.897 -32.31,28.119 -32.31,22.745 -31.668,22.103 v1@-30.866,22.103
  Bottom Copper w0.18: v1(-51.689,13.462) -49.657,13.462 -46.736,16.383 -42.164,16.383 -37.719,20.828 -37.719,21.59 -35.433,23.876 -33.147,23.876 -32.143,22.872 -32.143,22.491 -31.75,22.098 v1(-30.861,22.098)
DG_3: J1.15 J2.15 | length 38.4
  Top Copper w0.18: J1.15 -34.08,13.164 -33.225,14.019 -33.225,18.464 -32.81,18.879 -29.127,18.879 -28.829,19.177 -28.829,21.209 -29.21,21.59 -32.004,21.59 -32.81,22.396 -32.81,28.111 -33.556,28.857 -33.556,29.531 J2.15
DG_4: J1.14 J2.36 | length 36
  Top Copper w0.18: J1.14 -49.961,12.864 -49.796,13.029 -49.328,13.029 v1(-49.276,13.081) ; J2.36 -44.116,28.622 -43.307,27.813 -43.307,16.256 -42.672,15.621 -38.227,15.621 -37.846,15.24 -37.846,14.605 -38.227,14.224 -43.18,14.224 -43.688,14.732 -43.688,15.61 -43.942,15.864 v1(-43.942,15.875)
  Bottom Copper w0.18: v1(-49.276,13.081) -46.482,15.875 v1(-43.942,15.875)
DG_5: J1.13 J2.16 | length 36.4
  Top Copper w0.18: J1.13 -33.791,12.564 -32.38,13.975 v1(-32.38,18.288) ; J2.16 -34.096,29.571 -34.096,28.889 -33.292,28.085 -33.292,22.098 -32.149,20.955 -31.728,20.955 -31.623,20.85 -31.623,20.044 -31.728,19.939 -32.385,19.939 v1(-33.274,20.828)
  Bottom Copper w0.18: v1(-33.274,20.828) -32.38,19.934 v1(-32.38,18.288)
DG_6: J1.12 J2.17 | length 36.1
  Top Copper w0.18: v1(-51.943,12.573) -51.856,12.573 -51.603,12.32 -51.064,12.32 J1.12 ; J2.17 -34.6,29.575 -34.6,28.885 -33.785,28.07 -33.785,20.17 v1(-33.76,20.146)
  Bottom Copper w0.18: v1(-51.943,12.573) -47.898,12.573 -45.612,14.859 -43.688,14.859 -43.053,14.224 -41.275,14.224 -40.132,15.367 -40.068,15.431 -40.068,15.619 -40.502,16.053 -40.502,16.242 -40.314,16.431 -40.125,16.431 -39.669,15.975 -39.48,15.975 -39.291,16.164 -39.291,16.353 -39.48,16.541 -39.48,16.73 -39.291,16.919 -39.102,16.919 -38.936,16.752 -38.747,16.752 -37.973,17.526 -37.719,17.78 -37.719,19.05 -36.068,20.701 -34.316,20.701 v1(-33.76,20.146)
DG_7: J1.11 J2.37 | length 35.1
  Top Copper w0.18: J1.11 -48.12,11.951 -47.257,11.951 v1(-47.244,11.938) ; J2.37 -44.616,28.614 -44.068,28.066 -43.937,27.935 -43.937,27.746 -44.07,27.613 -44.141,27.613 -44.274,27.479 -44.274,27.212 -44.141,27.079 -43.898,27.079 -43.764,26.945 -43.764,26.678 -43.898,26.545 -44.331,26.545 -44.465,26.411 -44.465,26.144 -44.331,26.011 -43.898,26.011 -43.764,25.877 -43.764,25.61 -43.898,25.477 -44.331,25.477 -44.465,25.343 -44.465,25.076 -44.331,24.943 -43.898,24.943 -43.764,24.809 -43.764,24.542 -43.898,24.409 -44.331,24.409 -44.465,24.275 -44.465,24.008 -44.331,23.875 -43.898,23.875 -43.764,23.741 -43.764,23.474 -43.898,23.341 -44.331,23.341 -44.465,23.207 -44.465,22.94 -44.331,22.807 -43.898,22.807 -43.764,22.673 -43.764,22.406 -43.898,22.273 -44.331,22.273 -44.465,22.139 -44.465,21.872 -44.331,21.739 -43.898,21.739 -43.764,21.605 -43.764,21.338 -43.898,21.205 -44.331,21.205 -44.465,21.071 -44.465,20.804 -44.331,20.671 -43.9,20.671 -43.766,20.537 -43.766,20.447 -43.766,17.321 -44.434,16.653 -44.434,15.505 -44.196,15.267 v1(-44.196,14.224)
  Bottom Copper w0.18: v1(-47.244,11.938) -46.736,11.938 -46.646,11.938 -46.512,12.071 -46.512,13.329 -46.379,13.462 -46.112,13.462 -45.978,13.329 -45.978,11.198 -45.845,11.065 -45.578,11.065 -45.444,11.198 -45.444,11.805 -45.311,11.938 -44.831,11.938 -44.514,12.256 -44.196,12.573 -44.196,12.778 -44.196,12.868 -44.329,13.001 -45.125,13.001 -45.258,13.135 -45.258,13.402 -45.125,13.535 -44.329,13.535 -44.196,13.669 -44.196,13.843 v1(-44.196,14.224)
DR_0: J1.9 J2.38 | length 35.4
  Top Copper w0.18: v1(-49.149,11.811) -48.702,11.364 J1.9 ; J2.38 -45.116,28.606 -44.704,28.194 v1(-44.704,27.686)
  Bottom Copper w0.18: v1(-49.149,11.811) -50.8,11.811 -51.106,11.505 -52.018,11.505 -54.356,13.843 -54.356,15.339 -54.356,15.963 -54.223,16.097 -53.805,16.097 -53.671,16.23 -53.671,16.497 -53.805,16.631 -54.328,16.631 -54.461,16.764 -54.461,17.031 -54.328,17.165 -53.805,17.165 -53.671,17.298 -53.671,17.565 -53.805,17.699 -54.328,17.699 -54.461,17.832 -54.461,18.099 -54.328,18.233 -53.805,18.233 -53.671,18.366 -53.671,18.633 -53.805,18.767 -54.328,18.767 -54.461,18.9 -54.461,19.167 -54.328,19.301 -53.805,19.301 -53.671,19.434 -53.671,19.701 -53.805,19.835 -54.328,19.835 -54.461,19.968 -54.461,20.235 -54.328,20.369 -53.806,20.369 -53.673,20.502 -53.673,20.769 -53.806,20.903 -54.206,20.903 -54.34,21.036 -54.34,21.225 -54.103,21.462 -50.927,24.638 -49.276,24.638 -46.736,27.178 -45.243,27.178 -44.735,27.686 v1(-44.704,27.686)
DR_1: J1.8 J2.40 | length 35.3
  Top Copper w0.18: v1(-52.451,10.287) -52.39,10.348 -52.39,10.602 -51.928,11.064 J1.8 ; J2.40 -46.116,28.55 -46.106,28.54 -46.106,28.378 v1(-46.045,28.316)
  Bottom Copper w0.18: v1(-52.451,10.287) -52.538,10.287 -52.662,10.411 -52.702,10.411 -56.261,13.97 -56.261,19.219 -56.261,19.843 -56.128,19.977 -55.615,19.977 -55.481,20.11 -55.481,20.377 -55.615,20.511 -56.134,20.511 -56.267,20.644 -56.267,20.911 -56.134,21.045 -55.615,21.045 -55.481,21.178 -55.481,21.445 -55.615,21.579 -56.134,21.579 -56.267,21.712 -56.267,21.979 -56.134,22.113 -55.615,22.113 -55.481,22.246 -55.481,22.513 -55.615,22.647 -56.134,22.647 -56.267,22.78 -56.267,23.047 -56.134,23.181 -56.016,23.181 -55.882,23.314 -55.882,23.581 -56.016,23.715 -56.128,23.715 -56.261,23.848 -56.261,24.236 -56.261,24.765 -54.864,26.162 -49.149,26.162 -46.99,28.321 -46.05,28.321 v1(-46.045,28.316)
DR_2: J1.7 J2.20 | length 36.1
  Top Copper w0.18: J1.7 -48.117,10.78 -47.005,10.78 v1(-46.99,10.795) ; J2.20 -36.115,28.876 -35.308,28.069 -35.308,19.687 v1(-35.306,19.685)
  Bottom Copper w0.18: v1(-46.99,10.795) -42.672,10.795 -41.91,11.557 -41.91,12.319 -41.402,12.827 -41.338,12.891 -41.338,13.079 -41.41,13.151 -41.41,13.34 -41.221,13.528 -41.032,13.528 -40.385,12.881 -40.196,12.881 -40.008,13.07 -40.008,13.259 -40.654,13.906 -40.654,14.095 -40.466,14.284 -40.277,14.284 -39.63,13.637 -39.441,13.637 -39.252,13.825 -39.252,14.014 -39.899,14.661 -39.899,14.85 -39.711,15.039 -39.522,15.039 -38.875,14.392 -38.686,14.392 -38.497,14.581 -38.497,14.769 -39.144,15.416 -39.144,15.605 -38.955,15.794 -38.767,15.794 -38.266,15.293 -38.077,15.293 -37.888,15.482 -37.888,15.671 -38.129,15.911 -38.129,16.1 -37.473,16.756 -36.957,17.272 -36.957,19.05 -36.07,19.937 -35.645,19.937 -35.393,19.685 v1(-35.306,19.685)
DR_3: J1.6 J2.19 | length 36.1
  Top Copper w0.18: J1.6 -50.995,10.451 v1(-50.17,10.451) ; J2.19 -35.608,29.583 -35.608,28.877 -34.81,28.079 -34.81,17.982 -35.052,17.74 v1(-35.052,17.653)
  Bottom Copper w0.18: v1(-50.17,10.451) -48.297,10.451 -47.244,9.398 -40.386,9.398 -40.132,9.652 -40.068,9.716 -40.068,9.904 -40.765,10.601 -40.765,10.79 -40.576,10.979 -40.388,10.979 -39.691,10.282 -39.502,10.282 -38.798,10.986 -35.052,14.732 v1(-35.052,17.653)
DR_4: J1.5 J2.21 | length 36.1
  Top Copper w0.18: J1.5 -48.131,10.162 -46.357,10.162 v1(-46.355,10.16) ; J2.21 -36.616,28.869 -35.81,28.063 -35.81,19.308 v1(-35.814,19.304)
  Bottom Copper w0.18: v1(-46.355,10.16) -41.783,10.16 -40.259,11.684 -39.818,12.125 -39.629,12.125 -39.04,11.536 -38.851,11.536 -38.662,11.725 -38.662,11.914 -39.355,12.607 -39.355,12.795 -39.166,12.984 -38.978,12.984 -38.285,12.291 -38.096,12.291 -37.907,12.48 -37.907,12.669 -38.6,13.362 -38.6,13.551 -38.411,13.739 -38.222,13.739 -37.564,13.081 -37.375,13.081 -37.186,13.27 -37.186,13.459 -37.741,14.013 -37.741,14.202 -37.529,14.415 -37.465,14.478 -36.068,14.478 -35.56,14.986 -35.56,17.018 -36.195,17.653 -36.195,18.923 v1(-35.814,19.304)
DR_5: J1.4 J2.23 | length 36.6
  Top Copper w0.18: J1.4 -49.742,9.864 v1(-49.657,9.779) ; J2.23 -37.616,28.853 -36.81,28.047 -36.81,19.411 v1@-35.699,18.3
  Bottom Copper w0.18: v1(-49.657,9.779) -48.768,8.89 -39.878,8.89 -34.29,14.478 -34.29,18.034 -34.544,18.288 v1(-35.687,18.288)
DR_6: J1.3 J2.39 | length 35.5
  Top Copper w0.18: v1(-49.403,11.049) -49.348,10.994 -49.348,10.529 -48.383,9.564 J1.3 ; J2.39 -45.616,28.431 -45.339,28.154 v1(-45.339,28.067)
  Bottom Copper w0.18: v1(-49.403,11.049) -52.451,11.049 -54.991,13.589 -54.991,22.098 -54.991,22.722 -54.858,22.856 -54.189,22.856 -54.055,22.989 -54.055,23.256 -54.189,23.39 -54.883,23.39 -55.017,23.523 -55.017,23.79 -54.883,23.924 -54.346,23.924 -54.213,24.057 -54.213,24.324 -54.346,24.458 -54.843,24.458 -54.976,24.591 -54.976,24.78 -54.61,25.146 -54.483,25.273 -49.403,25.273 -46.99,27.686 -45.72,27.686 v1(-45.339,28.067)
DR_7: J1.2 J2.18 | length 36.4
  Top Copper w0.18: J1.2 -50.285,9.264 v1(-49.911,8.89) ; J2.18 -35.104,29.579 -35.104,28.881 -34.31,28.087 -34.31,19.665 -33.695,19.05 v1(-33.655,19.05)
  Bottom Copper w0.18: v1(-49.911,8.89) -49.403,8.382 -39.116,8.382 -33.655,13.843 v1(-33.655,19.05)
DUMMY1: J1.33
DUMMY2: J1.41
DUMMY3: J1.42
DUMMY4: J1.43
GND: C1.2 C2.1 C3.2 C4.2 C5.2 C6.2 J1.1 J1.10 J1.19 J1.28 J1.46 J1.47 J2.4 J2.29 J2.31 J2.SH R8.1 R9.1 U1.2 | length 24.8
  Top Copper w0.3: v1(-53.975,10.668) -52.979,11.664 J1.10 ; v1(-52.07,17.018) -52.016,17.018 -51.97,17.064 J1.28 ; J1.47 -48.31,8.264 J1.47@-48.26,8.214 ; J1.1 -46.048,8.964 v1(-44.704,7.62) ; J1.19 -47.003,14.364 v1(-46.99,14.351) ; J2.31 v1(-41.616,30.706) ; J2.29 v1(-40.616,30.706) ; v1(-28.116,28.476) J2.4
  Top Copper w0.5: v1(-57.277,16.764) C5.2 ; v1(-57.277,18.161) C6.2 ; v1(-57.277,19.431) C3.2 ; v1(-57.277,20.828) C4.2 ; v1(-57.15,31.115) U1.2@-56.388,31.115 ; v1(-56.642,34.036) C2.1 ; R9.1 -53.555,26.797 v1(-52.705,26.797) ; R8.1 -51.816,25.234 v1(-51.816,24.511) ; C1.2@-49.784,29.298 v1(-49.784,29.972) ; J1.46@-48.408,22.914 -48.408,24.871 v1(-47.498,25.781) ; v1(-48.26,7.493) J1.47@-48.26,8.214
  other v1: -56.515,4.572 -53.975,4.572 -51.435,4.572 -48.895,4.572 -46.355,4.572 -43.815,4.572 -41.275,4.572 -38.735,4.572 -36.195,4.572 -33.655,4.572 -31.115,4.572 -28.575,4.572 -26.035,4.572 -23.495,4.572 -24.765,7.112 -22.225,7.112 -53.975,9.652 -36.195,9.652 -33.655,9.652 -31.115,9.652 -23.495,9.652 -32.385,12.192 -29.845,12.192 -27.305,12.192 -22.225,12.192 -31.115,14.732 -28.575,14.732 -23.495,14.732 -29.845,17.272 -27.305,17.272 -22.225,17.272 -31.115,19.812 -23.495,19.812 -29.845,22.352 -27.305,22.352 -22.225,22.352 -23.495,24.892 -40.005,27.432 -29.845,27.432 -27.305,27.432 -22.225,27.432 -46.98,31.268 -24.14,31.268 -22.225,32.512
GPIO_2: J1.35 J2.11 | length 36.1
  Top Copper w0.18: J1.35 -47.511,19.164 -45.974,20.701 v1(-45.974,22.733) ; J2.11 -31.556,29.531 -31.556,28.889 -30.81,28.143 -30.81,24.714 v1(-30.099,24.003)
  Bottom Copper w0.18: v1(-45.974,22.733) -43.307,25.4 -39.497,25.4 -38.608,26.289 -32.639,26.289 -31.623,25.273 -29.973,25.273 -29.338,24.638 -27.537,24.638 -27.432,24.533 -27.432,23.876 -28.067,23.241 -29.994,23.241 -30.099,23.346 v1(-30.099,24.003)
GPIO_3: J1.34 J2.12 | length 36.4
  Top Copper w0.18: J1.34 -50.974,18.83 -50.199,18.83 v1(-50.165,18.796) ; J2.12 -32.08,29.555 -32.08,28.905 -31.276,28.101 -31.276,25.942 v1(-31.242,25.908)
  Bottom Copper w0.18: v1(-50.165,18.796) -50.165,19.431 -43.688,25.908 -39.751,25.908 -38.862,26.797 -27.305,26.797 -27.178,26.67 -27.178,26.013 -27.283,25.908 v1(-31.242,25.908)
LED+: C1.1 D1.1 J1.45 TEST1.1
LED-: J1.44 R8.2 TEST2.1 U1.3
NetD1_2: D1.2 L1.2 U1.1 U1.5
RESET_LCD: J1.36 J2.6 | length 33.9
  Top Copper w0.18: v1(-52.451,19.177) -52.364,19.177 -52.103,19.438 -51.849,19.438 -51.84,19.447 -51.025,19.447 J1.36 ; J2.6 -29.099,29.607 -29.099,30.845 v1(-29.083,30.861)
  Bottom Copper w0.18: v1(-52.451,19.177) -53.086,19.812 -53.086,21.336 -50.673,23.749 -48.87,23.749 -46.076,26.543 -44.831,26.543 -42.545,28.829 -29.972,28.829 -29.083,29.718 v1(-29.083,30.861)
SPI_MISO: J2.7
SPI_MOSI: J1.29 J2.8 | length 34.8
  Top Copper w0.18: J1.29 -47.152,17.364 -46.355,18.161 -46.355,18.795 -44.831,20.319 -44.831,26.162 -46.99,28.321 v1(-46.99,28.956) ; J2.8 -30.108,29.599 -30.108,30.725 v1(-30.099,30.734)
  Bottom Copper w0.18: v1(-46.99,28.956) -46.951,28.956 -46.603,29.304 -44.726,29.304 -44.101,29.304 -43.968,29.171 -43.968,28.729 -43.834,28.595 -43.567,28.595 -43.434,28.729 -43.434,29.171 -43.301,29.304 -43.061,29.304 -30.734,29.304 -30.099,29.939 v1(-30.099,30.734)
V_SYS: C2.2 J2.2 J2.3 L1.1 U1.6

## Polygon pours and split planes (outlines as drawn)
3V3_SYS on Top Copper "NONET_L-01_P-001" (solid, pour order 12): -55.245,16.129 -55.245,21.336 -55.118,21.463 -52.959,21.463 -52.324,20.828 -49.149,20.828 -48.895,20.574 -47.752,20.574 -47.625,20.447 -47.625,19.558 -47.752,19.431 -49.911,19.431 -50.292,19.812 -52.451,19.812 -53.34,18.923 -53.34,16.637 -53.848,16.129
V_SYS on Top Copper "V_SYS_L01_P013" (solid, pour order 13): -26.924,29.337 -26.924,34.417 -27.686,35.179 -54.102,35.179 -54.483,34.798 -54.483,31.877 -54.356,31.75 -52.959,31.75 -52.451,32.258 -50.165,32.258 -49.911,32.512 -49.911,33.02 -49.657,33.274 -28.194,33.274 -27.813,32.893 -27.813,29.337
3V3_SYS on Top Copper "3V3_SYS_L01_P014" (solid, pour order 14): -26.797,29.591 -26.797,11.303 -30.988,7.112 -53.34,7.112 -54.737,8.509 -54.737,13.462 -53.34,14.859 -53.34,16.637 -55.245,16.637 -55.245,15.621 -56.642,14.224 -56.642,6.731 -54.864,4.953 -28.321,4.953 -24.003,9.271 -24.003,27.813 -25.781,29.591
LED+ on Top Copper "NONET_L-01_P-001" (solid, pour order 11): -47.625,21.971 -49.784,21.971 -50.673,22.86 -50.673,25.908 -51.054,26.289 -51.689,26.289 -52.07,26.67 -52.07,27.813 -51.816,28.067 -49.276,28.067 -48.895,27.686 -48.895,26.035 -49.149,25.781 -49.149,22.606 -48.895,22.352 -47.625,22.352
LED- on Top Copper "NONET_L-01_P-001" (solid, remove dead copper, pour order 10): -50.673,21.59 -52.705,21.59 -57.023,25.908 -57.023,30.226 -56.769,30.48 -55.499,30.48 -55.245,30.226 -55.245,26.67 -54.483,25.908 -53.086,25.908 -52.705,25.527 -52.705,23.749 -51.435,22.479 -50.673,22.479 -50.546,22.352 -50.546,21.717
NetD1_2 on Top Copper "NONET_L-01_P-001" (solid, pour order 4): -50.038,30.734 -50.546,30.734 -50.927,30.353 -50.927,29.21 -51.181,28.956 -51.816,28.956 -51.943,29.083 -51.943,29.972 -52.705,30.734 -54.483,30.734 -55.499,31.75 -56.769,31.75 -56.896,31.877 -56.896,32.385 -56.769,32.512 -55.118,32.512 -54.61,32.004 -54.61,31.75 -54.356,31.496 -52.578,31.496 -52.324,31.75 -50.038,31.75
GND on Signal Layer 1 "NONET_L-01_P-001" (solid, pour order 5): -59.944,37.084 -60.706,36.322 -60.706,1.778 -15.367,1.778 -12.827,4.318 -12.827,37.592
GND on Signal Layer 2 "NONET_L-01_P-001" (solid, pour order 6): -60.96,37.719 -60.96,2.286 -59.182,0.508 -58.928,0.762 -16.002,0.762 -11.811,4.953 -11.811,37.719 -13.335,39.243

## Silkscreen, mask and mechanical layers (free items; w line width, h text height)
Top Overlay:
  drawing of 23 lines, arcs and shapes, not listed
  text "-" at -56.388,27.94 h1.75
  text "40" at -46.482,27.559 h1.75
  text "BOT" at -37.757,27.104 h1.75
  text "1" at -26.035,27.051 h1.75
  text "+" at -50.292,23.749 h1.75
  text "BOT" at -43.741,8.725 h1.75 r90
Route Tool Path:
  circle w1.016: c135.491,238.477 r2.692
  lines w0: -13.294,-10.648 -12.113,-10.959 ccw(c-11.984,-10.468) -11.708,-10.894 -9.736,-9.617
Dimensions: